# Altium PCB USBBridge.PcbDoc
Units mm, origin at the board's own origin, x right, y up, seen from the top; angles counter-clockwise.
Board outline 7.62 x 19.94 mm, 2 copper layers (Top Layer, Bottom Layer), stack 1.671 mm thick; 3 components, 5 nets, 21 pads, 0 vias.
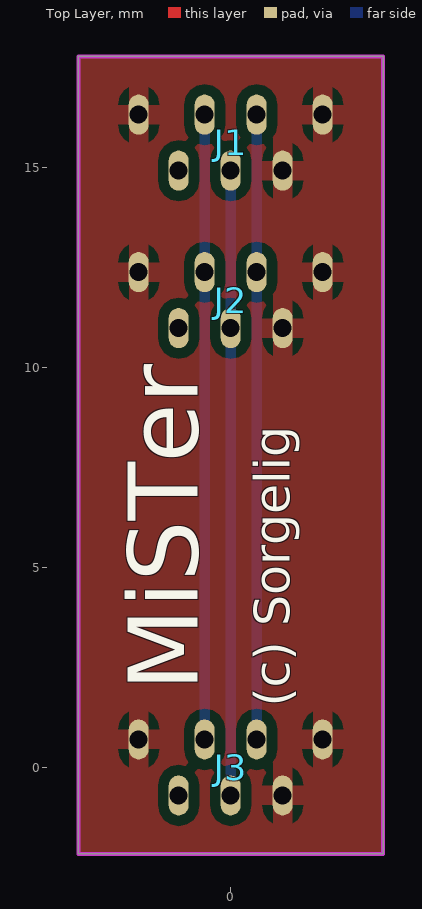
[diagram p0: Top Layer view]
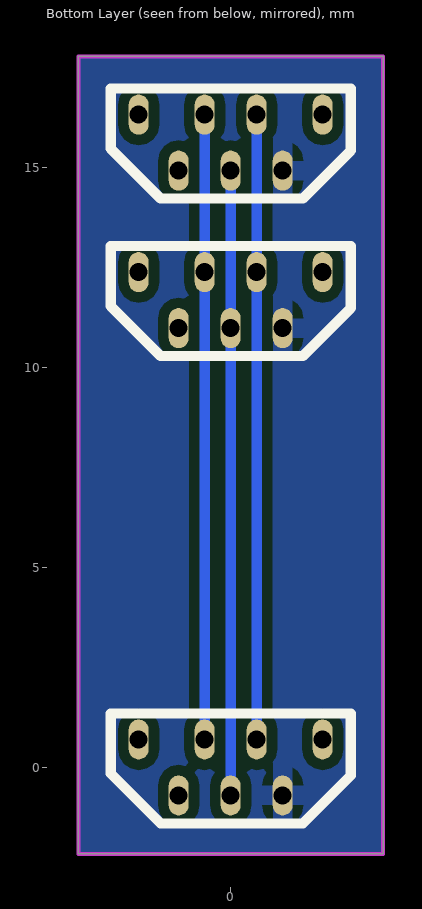
[diagram p1: Bottom Layer view, seen from below]

## Layer stack, top to bottom
Top Solder: solder mask 0.0102, Solder Resist, Dk 3.5
Top Layer: signal copper 0.0356
Dielectric 1: dielectric 1.6, FR-4, Dk 4.8
Bottom Layer: signal copper 0.0356
Bottom Solder: solder mask 0.0102, Solder Resist, Dk 3.5

## Board outline
-3.81,17.78 3.81,17.78 3.81,-2.159 -3.81,-2.159

## Design rules (kind name [scope] priority, off if disabled: settings)
BoardOutlineClearance [All] p1: gap=0 ignorepadtopadclearanceinfootprint=FALSE
Clearance keep-out_clearance [InNamedPolygon('ground') or InNamedPolygon('power') vs OnLayer('Keep-Out Layer')] p1: gap=0 ignorepadtopadclearanceinfootprint=FALSE
Clearance [All] p2: gap=0.254 ignorepadtopadclearanceinfootprint=TRUE except(0: Arc-Hole Track-Hole SMDPad-Hole THPad-Hole Via-Hole Fill-Hole Poly-Hole Region-Hole Text-Hole)
ComponentClearance [All] p1 off: gap=0.254 collisioncheckmode=3 verticalgap=0.254 showdistances=FALSE
Height [All] p1 off: minheight=0 maxheight=25.4 prefheight=12.7
HoleSize [All] p1: absolutevalues=TRUE maxlimit=6 minlimit=0.025 maxpercent=80.000 minpercent=20.000
MinimumSolderMaskSliver [All] p1: minsoldermaskwidth=0.25
PolygonConnect PolygonConnect_1 [HasFootprint('SOT23-5') or IsVia] p1: connectstyle=Direct reliefconductorwidth=0.762 reliefentries=4 polygonreliefangle="90 Angle" airgapwidth=0.254
PolygonConnect [not IsVia] p2: connectstyle=Relief reliefconductorwidth=0.5 reliefentries=4 polygonreliefangle="90 Angle" airgapwidth=0.254
RoutingVias [All] p1: holewidth=0.4 width=1 viastyle="Through Hole" minholewidth=0.4 minwidth=1 maxholewidth=0.4 maxwidth=1
SilkToSolderMaskClearance [IsPad] p1 off: minsilkscreentomaskgap=0.127 clearancetoexposedcopper=TRUE
SolderMaskExpansion SolderMaskExpansion_U1 [InComponent('U1')] p1: expansion=0
SolderMaskExpansion [All] p2: expansion=0.051
Width Width_power [InNetClass('power')] p1: maxlimit=2 minlimit=0.254 preferedwidth=0.508 minimp=50.000000 maximp=50.000000 favimp=50.000000
Width Width_signal [All] p2: maxlimit=0.254 minlimit=0.254 preferedwidth=0.254
25 further rules are at their usual default settings.

## Components (designator, comment, footprint, x,y, rotation, side; value= is the part's Value field where it differs from the comment)
J1 "MicroUSB THT" "MicroUSB THT" 0,15.621 r0 top
J2 "MicroUSB THT" "MicroUSB THT" 0,11.684 r0 top
J3 "MicroUSB THT" "MicroUSB THT" 0,0 r0 top

## Footprints (in the part's own frame and the unit in brackets; to place one, negate y for a bottom-side part, rotate by r counter-clockwise, add the part's x,y. Pads: shape width x height; smd on the part's side, far side on the other; paste and mask are expansions set on the pad)
"MicroUSB THT" [mm]
  oval 0.5x1 hole 0.45 mask+0: 1(-1.3,-0.7) 2(-0.65,0.7) 3(0,-0.7) 4(0.65,0.7) 5(-2.3,0.7) 5(1.3,-0.7) 5(2.3,0.7)

## Part data
J1 J2 J3: Manufacturer_Name=Molex, Manufacturer_Part_Number=47346-0001, Mouser Part Number=538-47346-0001, RS Part Number=7025475P, Allied_Number=70266948, Allied Price/Stock=https://www.alliedelec.com/molex-incorporated-47346-0001/70266948/, Datasheet Link=http://www.molex.com/pdm_docs/sd/473460001_sd.pdf, Mouser Price/Stock=https://www.mouser.com/Search/Refine.aspx?Keyword=538-47346-0001, RS Price/Stock=http://uk.rs-online.com/web/p/products/7025475P

## Nets (pads, with @x,y where several pads share a name; then routed paths per layer and width w, separated by ;. In a path a pad name is that pad's centre, name@x,y a point inside that pad or via, vN(x,y) a via of type N, cw(c..) or ccw(c..) an arc to the next point about the centre after c; other vN are vias at no path point)
GND: J1.5 J2.5 J3.5
NetJ1_2: J1.2 J2.2 J3.2 | length 15.6
  Bottom Layer w0.254: J3.2 J2.2 J1.2
NetJ1_3: J1.3 J2.3 J3.3 | length 15.6
  Bottom Layer w0.254: J3.3 J2.3 J1.3
NetJ1_4: J1.4 J2.4 J3.4 | length 15.6
  Bottom Layer w0.254: J3.4 J2.4 J1.4
VCC: J1.1 J2.1 J3.1

## Polygon pours and split planes (outlines as drawn)
GND on Top Layer "ground" (solid, remove dead copper, pour order 27): -3.81,17.78 3.81,17.78 3.81,-2.159 -3.81,-2.159
VCC on Bottom Layer "power" (solid, remove dead copper, pour order 28): -3.81,17.78 3.81,17.78 3.81,-2.159 -3.81,-2.159

## Keep-outs
Keep-Out Layer:
  the board outline again, w0.1

## Silkscreen, mask and mechanical layers (free items; w line width, h text height)
Top Overlay:
  text "MiSTer" at -0.254,1.905 h3 r90
  text "(c) Sorgelig" at 1.778,1.524 h1.52 r90